# Altium PCB Motor Driver.PcbDoc
Units mil, origin at the board's own origin, x right, y up, seen from the top; angles counter-clockwise.
Board outline 1815.03 x 1805.03 mil, 4 copper layers (Top Layer, Signal Layer, GND, Bottom Layer), stack 23.756 mil thick; 39 components, 38 nets, 181 pads, 59 vias.
Unrouted connection lines stored in the file: 7.
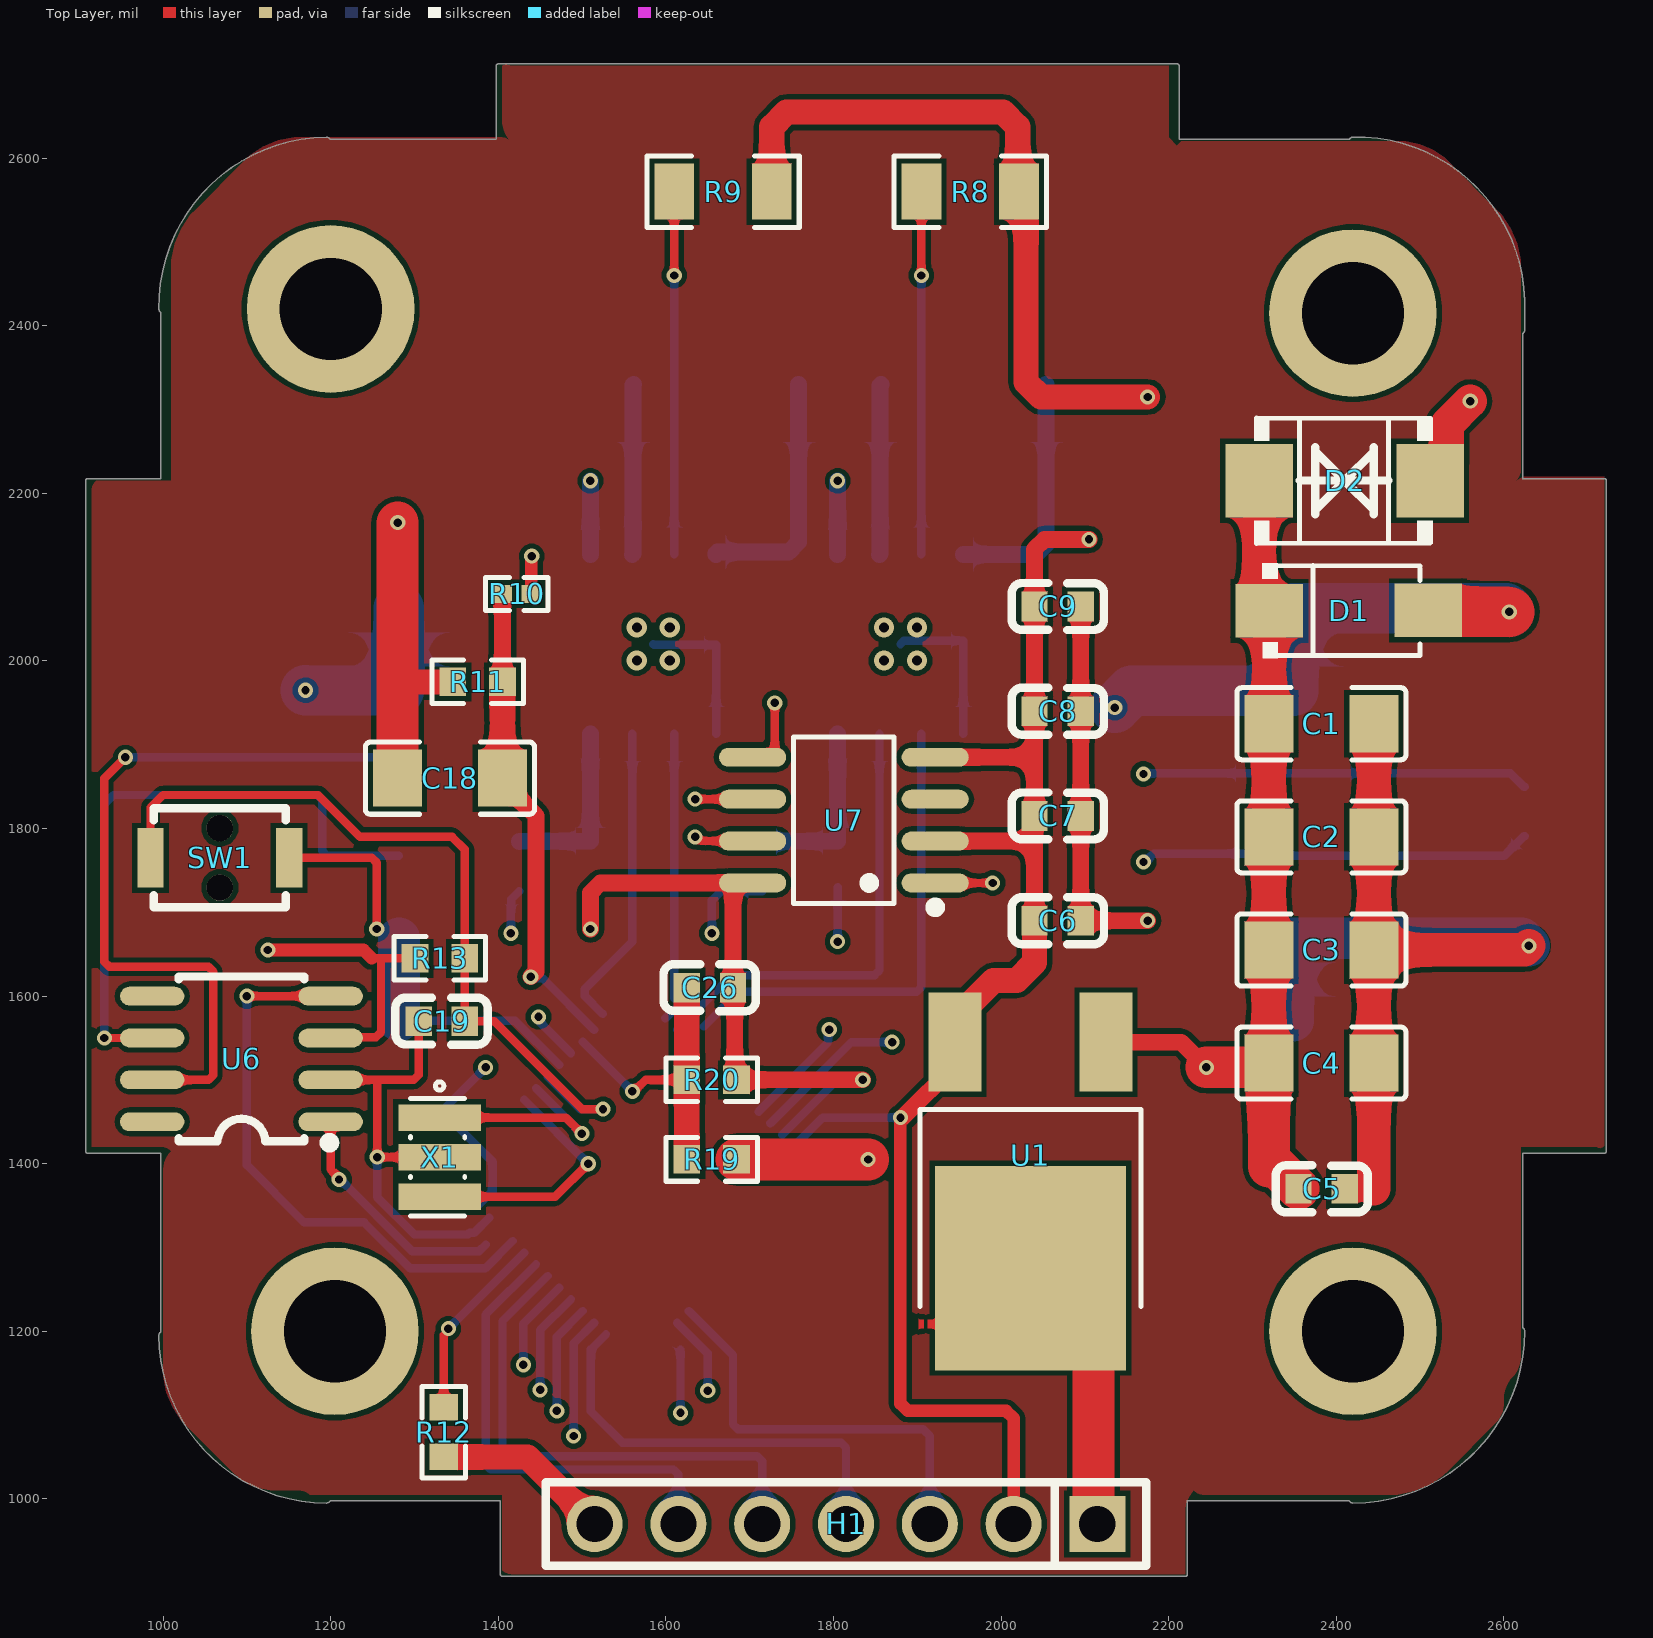
[diagram p0: Top Layer view]
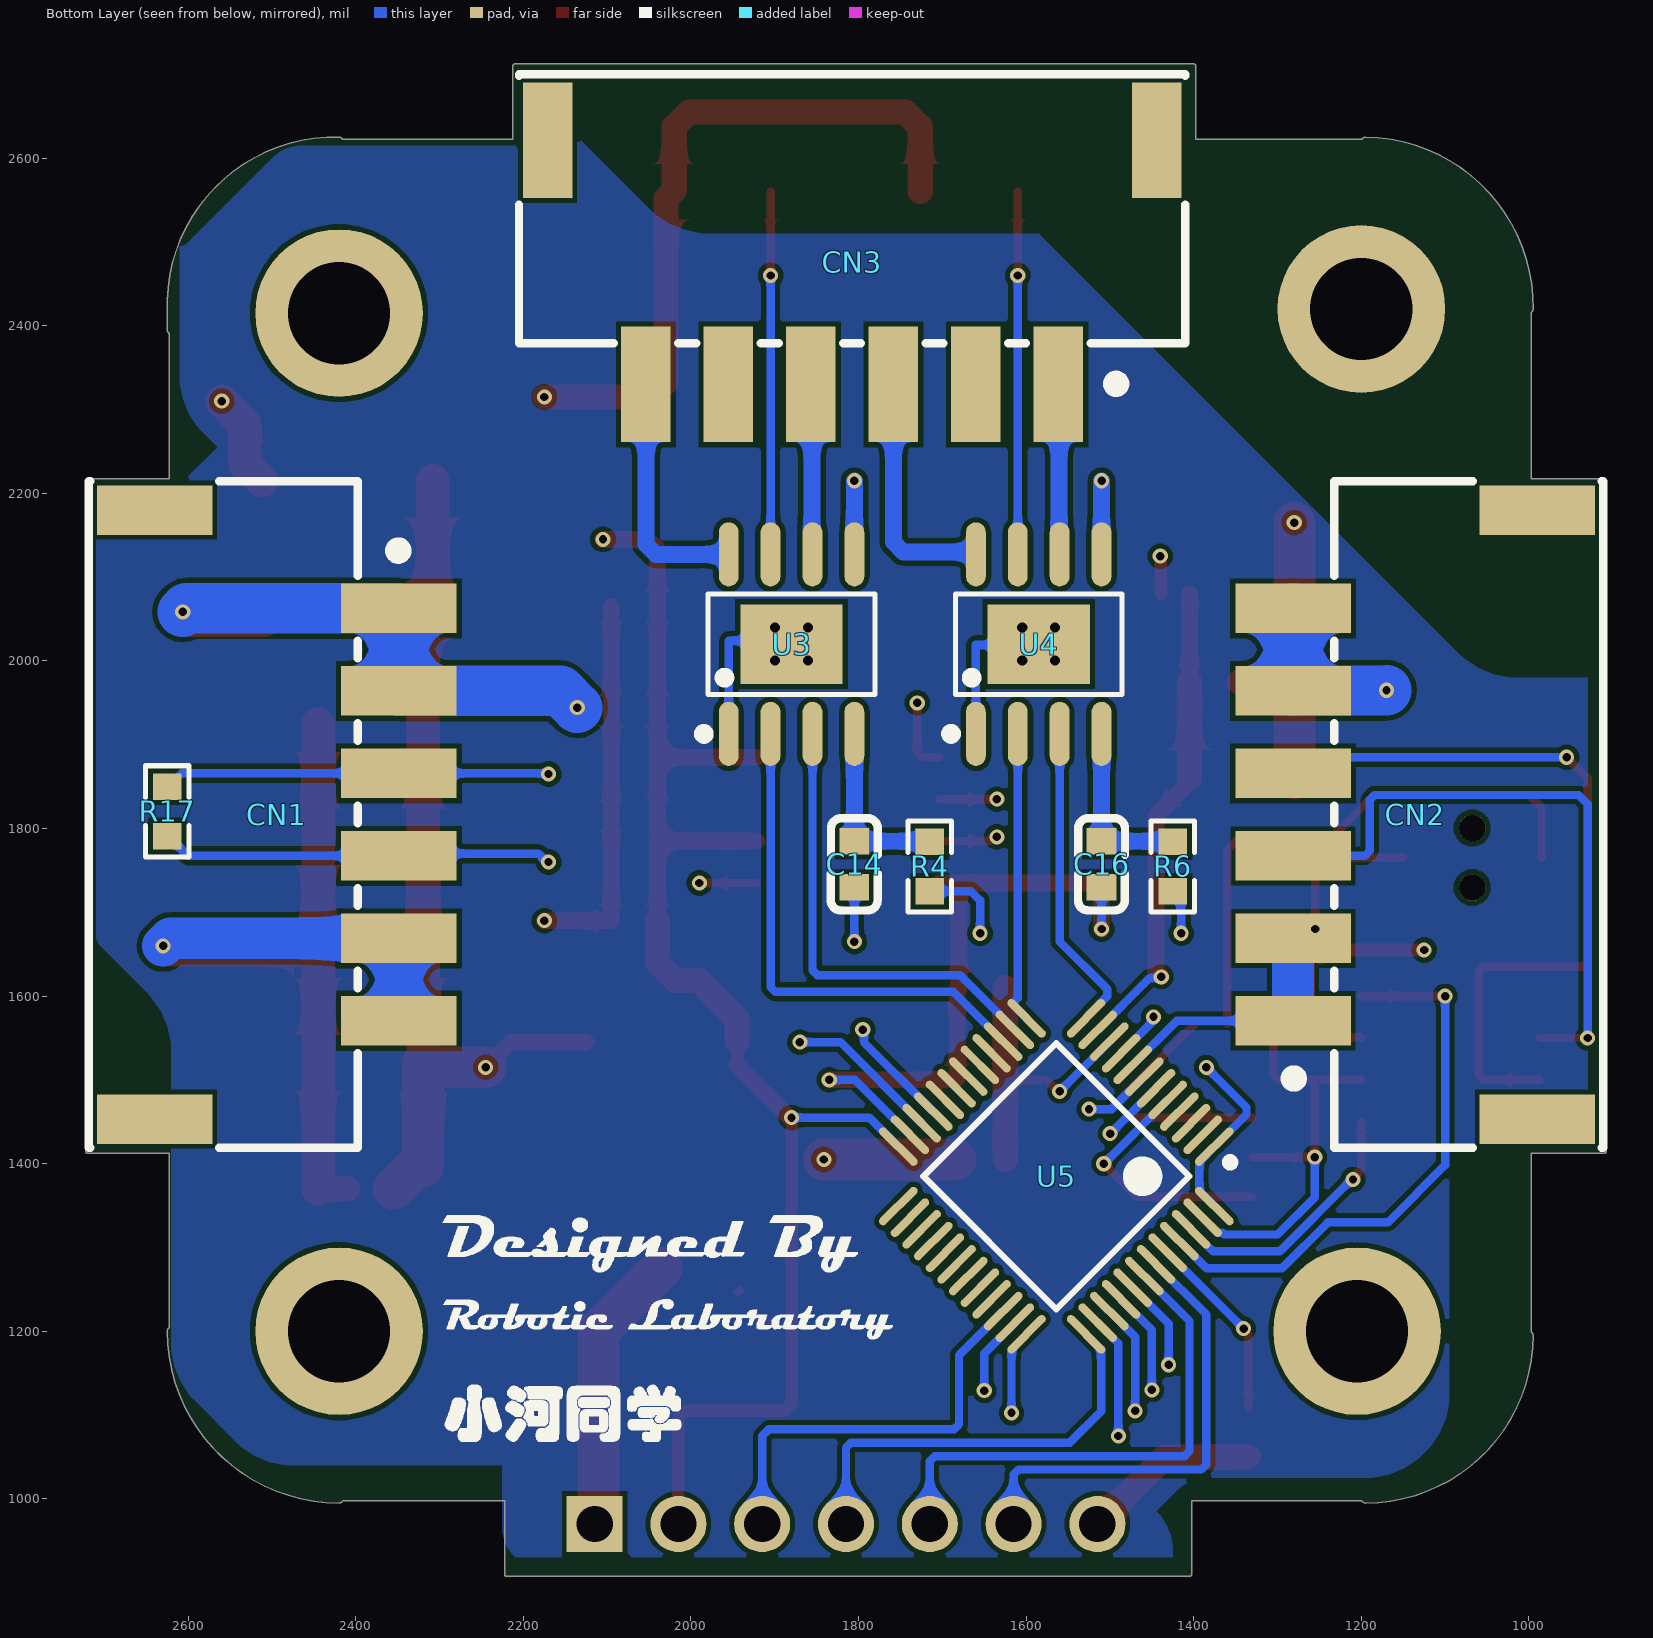
[diagram p1: Bottom Layer view, seen from below]
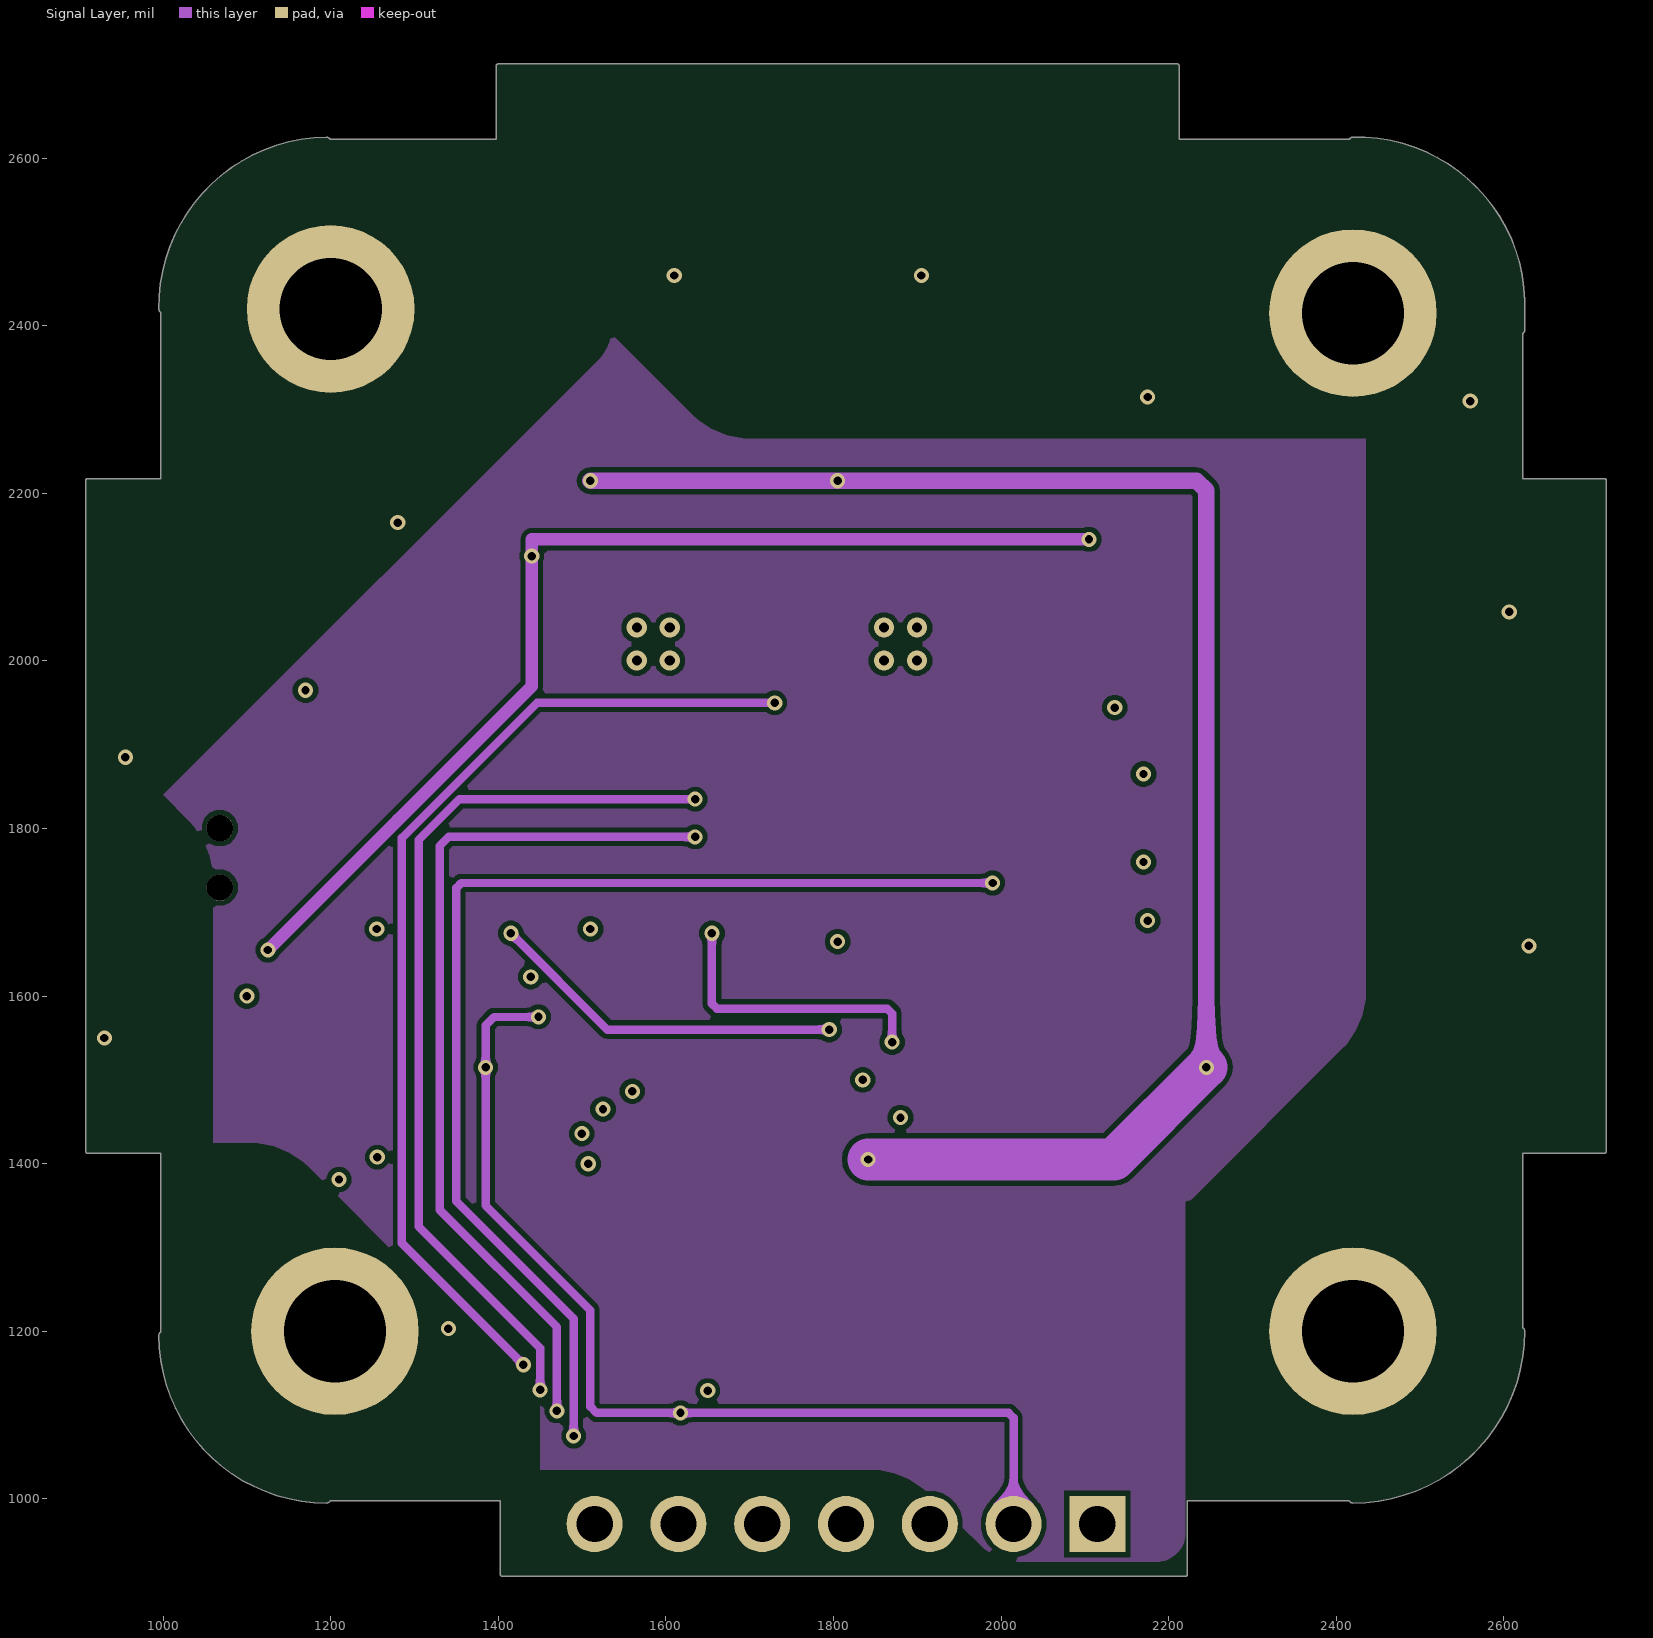
[diagram p2: Signal Layer]
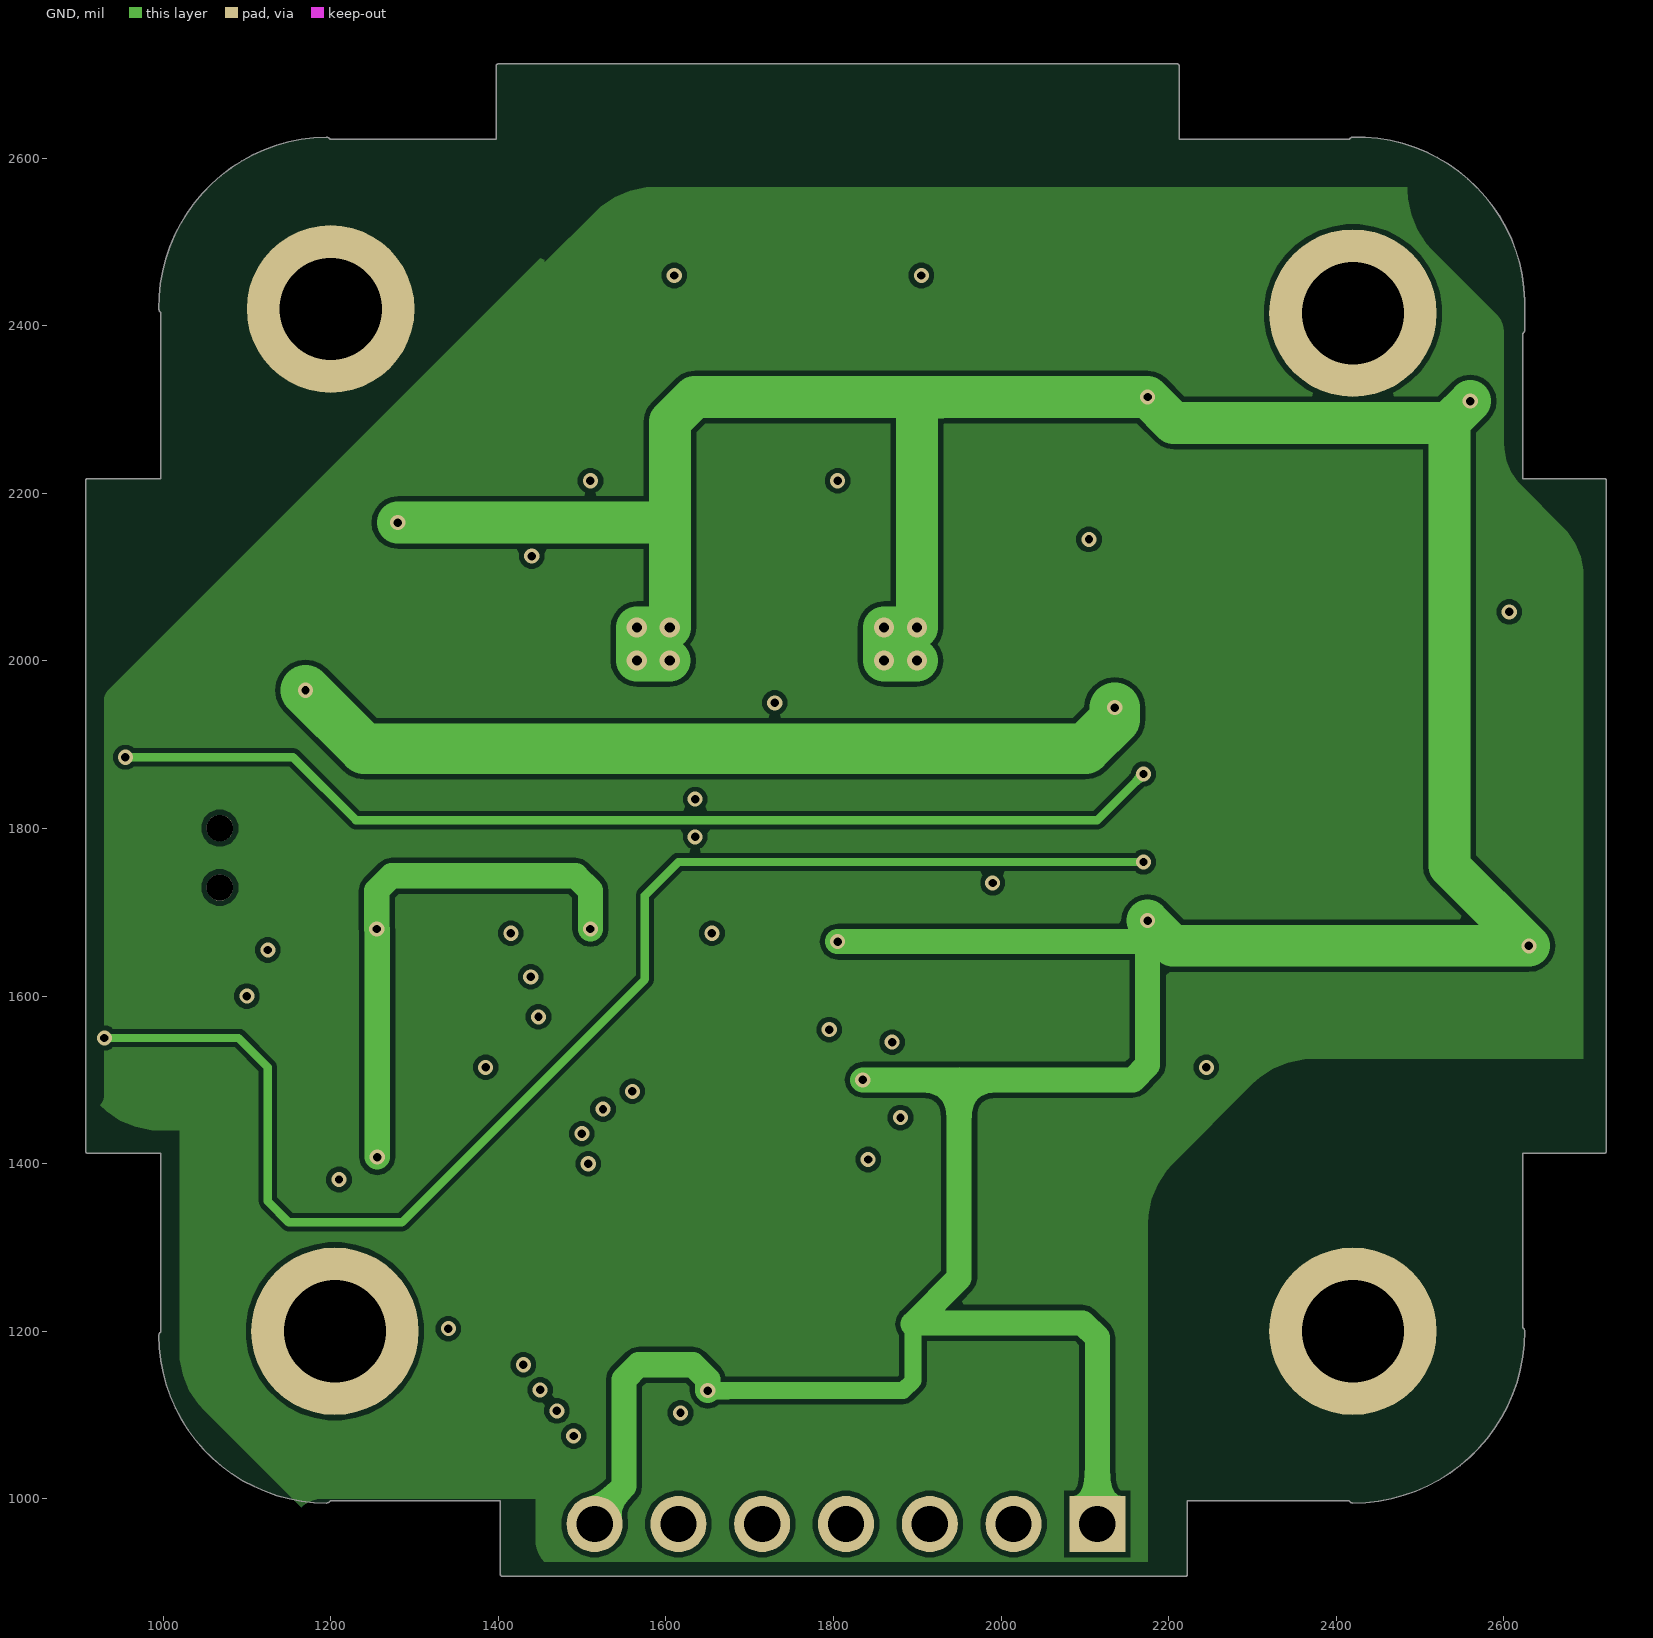
[diagram p3: GND]

## Layer stack, top to bottom
Top Solder: solder mask 0.4, Solder Resist, Dk 3.5
Top Layer: signal copper 1.4
Dielectric 2: prepreg 2.8, PP-006, Dk 4.1
Signal Layer: signal copper 1.378
Dielectric 1: dielectric 12.6, FR-4, Dk 4.8
GND: signal copper 1.378
Dielectric 3: prepreg 2.8, PP-006, Dk 4.1
Bottom Layer: signal copper 1.4
Bottom Solder: solder mask 0.4, Solder Resist, Dk 3.5

## Board outline
994.99,1195 cw(c1000,1195) 997.49,1199.34 997.49,1412.48 910,1412.48 cw(c910,1415) 907.49,1415 907.49,2215 cw(c910,2215) 910,2217.51 997.49,2217.51 997.49,2415.66 cw(c1000,2420) 994.99,2419.94 cw(c1197.5,2422.5) 1194.94,2625.01 cw(c1195,2620) 1199.34,2622.52 1397.48,2622.52 1397.48,2710 cw(c1400,2710) 1400,2712.52 2210,2712.52 cw(c2210,2710) 2212.51,2710 cw(c2210,2710) 2212.51,2710 2212.51,2622.51 2415.66,2622.51 cw(c2420,2620) 2419.87,2625.01 cw(c2425,2425) 2625.01,2430.13 cw(c2620,2430) 2625.01,2430 2625.01,2395 cw(c2620,2395) 2622.51,2390.66 2622.51,2217.51 2720,2217.51 cw(c2720,2215) 2722.51,2215 2722.51,1415 cw(c2720,1415) 2720,1412.48 2622.51,1412.48 2622.51,1204.34 cw(c2620,1200) 2625.01,1200 cw(c2420,1200) 2420,994.99 cw(c2420,1000) 2415.66,997.49 2222.51,997.49 2222.51,910 cw(c2220,910) 2220,907.49 1405,907.49 cw(c1405,910) 1402.48,910 1402.48,997.49 1199.34,997.49 cw(c1195,1000) 1195,994.99 cw(c1195,1195)

## Design rules (kind name [scope] priority, off if disabled: settings)
Clearance [All] p1: gap=6 ignorepadtopadclearanceinfootprint=FALSE
ComponentClearance [All] p1: gap=0 collisioncheckmode=3 verticalgap=0 showdistances=FALSE
HoleSize [All] p1: absolutevalues=TRUE maxlimit=10000 minlimit=8 maxpercent=80.000 minpercent=20.000
MinimumSolderMaskSliver [All] p1: minsoldermaskwidth=1
PolygonConnect [All] p1: connectstyle=Relief reliefconductorwidth=10 reliefentries=4 polygonreliefangle="90 Angle" airgapwidth=10
RoutingVias [All] p1: holewidth=28 width=50 viastyle="Through Hole" minholewidth=28 minwidth=50 maxholewidth=28 maxwidth=50
SilkToSilkClearance [All] p1: silktosilkclearance=0
SilkToSolderMaskClearance [IsPad] p1: minsilkscreentomaskgap=0 clearancetoexposedcopper=TRUE
SolderMaskExpansion [All] p1: expansion=4 istentingtop=FALSE
Width [All] p1: maxlimit=1000 minlimit=10 preferedwidth=10
25 further rules are at their usual default settings.

## Classes and differential pairs
component class MCU: SW3

## Components (designator, comment, footprint, x,y, rotation, side; value= is the part's Value field where it differs from the comment)
C1 "100uF" C1206 2382.3,1925 r0 top
C2 "100uF" C1206 2382.3,1790 r0 top
C3 "100uF" C1206 2382.3,1655 r0 top
C4 "100uF" C1206 2382.3,1520 r0 top
C5 "100nF" C0603 2382.55,1370 r180 top
C6 "1uF" C0603 2067.55,1690 r180 top
C7 "1uF" C0603 2067.55,1815 r180 top
C8 "100nF" C0603 2067.55,1940 r180 top
C9 "100nF" C0603 2067.55,2065 r180 top
C14 "100nF" C0603 1805,1757.44 r90 bottom
C16 "100nF" C0603 1510,1757.44 r90 bottom
C18 "10uF" C1206 1342.3,1860 r0 top
C19 "100nF" C0603 1332.56,1570 r0 top
C26 "100nF" C0603 1652.56,1610 r0 top
CN1 "WAFER-254W-6P" CONN-SMD_WAFER-254W-6P 2494.33,1816.61 r270 bottom
CN2 "WAFER-254W-6P" CONN-SMD_WAFER-254W-6P 1135.67,1816.62 r90 bottom
CN3 "WAFER-254W-6P" CONN-SMD_WAFER-254W-6P 1807.64,2475.67 r0 bottom
D1 "SS54" SMA_L4.3-W2.6-LS5.0-RD 2415,2060 r0 top
D2 "SMBJ28CA" SMB_L4.6-W3.6-LS5.3-BI 2410,2215 r180 top
H1 "PZ254V-11-07P" HDR-TH_7P-P2.54-V-M 1815,970 r180 top
R4 "1K" R0603 1715,1754.66 r90 bottom
R6 "1K" R0603 1425,1754.65 r90 bottom
R8 "0.1" R1206 1963.22,2560 r0 top
R9 "0.1" R1206 1668.22,2560 r0 top
R10 "NTCThermistor" R0402 1422.04,2080 r180 top
R11 "3.3K" R0603_NEW 1375.35,1975 r0 top
R12 "10K" R0603 1335,1079.66 r270 top
R13 "10K" R0603 1330.34,1645 r180 top
R17 "120" R0603 2625,1820.34 r270 bottom
R19 "10K" R0603 1654.65,1405 r180 top
R20 "1K" R0603 1654.66,1500 r0 top
SW1 "K2-1807UA-A4DW-06" KEY-SMD_L4.0-W2.9-L 1067.68,1765 r0 top
U1 "LP2950CDTX-3.3/NOPB" TO-252-2_L6.6-W6.1-P4.57-LS9.9-BR-CW 2035.16,1410.2 r90 top
U3 "A4950ELJTR-T" SOIC-8_L4.9-W3.9-P1.27-LS6.0-BL-EP 1880,2020 r180 bottom
U4 "A4950ELJTR-T" SOIC-8_L4.9-W3.9-P1.27-LS6.0-BL-EP 1585,2020 r180 bottom
U5 "STM32F103C8T6" STM-LQFP48_L 1564.01,1384.91 r315 bottom
U6 "SN65HVD232DR" SOIC-8_L5.0-W4.0-P1.27-LS6.0-BL 1093.5,1525 r90 top
U7 "MT6816CT-ACD" SOP-8_L5.0-W4.0-P1.27-LS6.0-BL 1812.5,1810 r90 top
X1 "12MHz" CRYSTAL-SMD_3P-L3.2-W1.3-P1.2-BL 1330,1407.76 r270 top

## Footprints (in the part's own frame and the unit in brackets; to place one, negate y for a bottom-side part, rotate by r counter-clockwise, add the part's x,y. Pads: shape width x height; smd on the part's side, far side on the other; paste and mask are expansions set on the pad)
C0603 [mm]
  rect 0.8x0.9 smd: 1(-0.7,0) 2(0.7,0)
  silkscreen extent -1.41,-0.71 1.39,0.72
C1206 [mm]
  rect 1.485x1.728 smd: 1(-1.593,0) 2(1.593,0)
  silkscreen extent -2.56,-1.09 2.56,1.09
CONN-SMD_WAFER-254W-6P [mm]
  rect 1.5x3.5 smd: 1(-6.25,3.7) 2(-3.75,3.7) 3(-1.25,3.7) 4(1.25,3.7) 5(3.75,3.7) 6(6.25,3.7) 7(-9.23,-3.7) 8(9.23,-3.7)
  silkscreen extent -10.1,-5.7 10.1,3.88
CRYSTAL-SMD_3P-L3.2-W1.3-P1.2-BL [mm]
  rect 0.8x2.5 smd: 1(-1.2,0) 2(0,0) 3(1.2,0)
  silkscreen extent -2.29,-0.89 1.78,0.76
HDR-TH_7P-P2.54-V-M [mm]
  rect 1.7x1.7 hole 1.1: 1(-7.62,0)
  round 1.7 hole 1.1: 2(-5.08,0) 3(-2.54,0) 4(0,0) 5(2.54,0) 6(5.08,0) 7(7.62,0)
  silkscreen extent -9.1,-1.27 9.1,1.27
KEY-SMD_L4.0-W2.9-L [mm]
  rect 0.8x1.8 smd: 1(-2.1,0) 2(2.1,0)
  round 0.8 hole 0.8 unplated: ""(0,-0.9) ""(0,0.9)
  silkscreen extent -2,-1.5 2,1.5
R0402 [mm]
  rect 0.566x0.54 smd: 1(-0.433,0) 2(0.433,0)
  silkscreen extent -0.94,-0.5 0.94,0.5
R0603 [mil]
  rect 31.75x34.02 smd: 1(-29.66,0) 2(29.65,0)
  silkscreen extent -55,-26 55,26
R0603_NEW [mil]
  rect 31.75x34.02 smd: 1(-29.65,0) 2(29.65,0)
  silkscreen extent -55,-26 55,26
R1206 [mil]
  rect 47.54x66.97 smd: 1(-58.22,0) 2(58.22,0)
  silkscreen extent -91,-42 91,42
SMA_L4.3-W2.6-LS5.0-RD [mm]
  rect 2.046x1.62 smd: 1(-2.404,-0.009) 2(2.404,0.009)
  silkscreen extent -2.61,-1.44 2.16,1.44
SMB_L4.6-W3.6-LS5.3-BI [mil]
  rect 80.61x88.23 smd: 1(-102.02,0) 2(102.02,0)
  silkscreen extent -105,-75 108,75
SOIC-8_L4.9-W3.9-P1.27-LS6.0-BL-EP [mm]
  oval 0.602x1.941 smd: 1(-1.905,-2.72) 2(-0.635,-2.72) 3(0.635,-2.72) 4(1.905,-2.72) 5(1.905,2.72) 6(0.635,2.72) 7(-0.635,2.72) 8(-1.905,2.72)
  rect 3.098x2.41 smd: 9(0,0)
  silkscreen extent -2.81,-2.87 2.53,1.52
SOIC-8_L5.0-W4.0-P1.27-LS6.0-BL [mil]
  oval 22.38x76.78 smd: 1(-75,-106.5) 2(-25,-106.5) 3(25,-106.5) 4(75,-106.5) 5(75,106.5) 6(25,106.5) 7(-25,106.5) 8(-75,106.5)
  silkscreen extent -106,-111 98,75
SOP-8_L5.0-W4.0-P1.27-LS6.0-BL [mil]
  oval 22.6x80.14 smd: 1(-75,-108.97) 2(-25,-108.97) 3(25,-108.97) 4(75,-108.97) 5(75,108.97) 6(25,108.97) 7(-25,108.97) 8(-75,108.97)
  silkscreen extent -110,-115 99,60
STM-LQFP48_L [mm] "QFP, 48-Leads, Body 7x7mm, Pitch 0.5mm, IPC High Density"
  oval 1.55x0.25 smd: 1(-4.025,2.75) 2(-4.025,2.25) 3(-4.025,1.75) 4(-4.025,1.25) 5(-4.025,0.75) 6(-4.025,0.25) 7(-4.025,-0.25) 8(-4.025,-0.75) 9(-4.025,-1.25) 10(-4.025,-1.75) 11(-4.025,-2.25) 12(-4.025,-2.75) 25(4.025,-2.75) 26(4.025,-2.25) 27(4.025,-1.75) 28(4.025,-1.25) 29(4.025,-0.75) 30(4.025,-0.25) 31(4.025,0.25) 32(4.025,0.75) 33(4.025,1.25) 34(4.025,1.75) 35(4.025,2.25) 36(4.025,2.75)
  oval 0.25x1.55 smd: 13(-2.75,-4.025) 14(-2.25,-4.025) 15(-1.75,-4.025) 16(-1.25,-4.025) 17(-0.75,-4.025) 18(-0.25,-4.025) 19(0.25,-4.025) 20(0.75,-4.025) 21(1.25,-4.025) 22(1.75,-4.025) 23(2.25,-4.025) 24(2.75,-4.025) 37(2.75,4.025) 38(2.25,4.025) 39(1.75,4.025) 40(1.25,4.025) 41(0.75,4.025) 42(0.25,4.025) 43(-0.25,4.025) 44(-0.75,4.025) 45(-1.25,4.025) 46(-1.75,4.025) 47(-2.25,4.025) 48(-2.75,4.025)
  silkscreen extent -4.15,-2.85 2.85,3.55, body extent -3.5,-3.5 3.5,3.5, height 1.6
TO-252-2_L6.6-W6.1-P4.57-LS9.9-BR-CW [mm]
  rect 3x1.6 smd: 1(3.424,-2.29) 3(3.424,2.29)
  rect 6.2x5.8 smd: 2(-3.424,0)
  silkscreen extent -4.58,-3.35 1.38,3.35

## Part data
C1 C2 C3 C4: BOM_JLCPCB Part Class="Extended Part", BOM_Manufacturer="Murata Electronics", BOM_Manufacturer Part=GRM31CR61A107ME05L, BOM_Supplier=LCSC, BOM_Supplier Part=C312983, Contributor=LCSC, nameAlias=Capacitance, spicePre=C, spiceSymbolName=GRM31CR61A107ME05L
C5 C8 C9 C14 C16 C19 C26: BOM_JLCPCB Part Class="Extended Part", BOM_Manufacturer=SAMSUNG, BOM_Manufacturer Part=CL10B104KB8NNNC, BOM_Supplier=LCSC, BOM_Supplier Part=C1591, nameAlias=Capacitance, spicePre=C, spiceSymbolName=CL10B104KB8NNNC
C6 C7: BOM_JLCPCB Part Class="Basic Part", BOM_Manufacturer=SAMSUNG, BOM_Manufacturer Part=CL10A105KB8NNNC, BOM_Supplier=LCSC, BOM_Supplier Part=C15849, nameAlias=Capacitance, spicePre=C, spiceSymbolName=CL10A105KB8NNNC
C18: BOM_JLCPCB Part Class="Basic Part", BOM_Manufacturer=SAMSUNG, BOM_Manufacturer Part=CL31A106KBHNNNE, BOM_Supplier=LCSC, BOM_Supplier Part=C13585, nameAlias=Capacitance, spicePre=C, spiceSymbolName=CL31A106KBHNNNE
CN1 CN2 CN3: BOM_Manufacturer=XUNPU(讯普), BOM_Manufacturer Part=WAFER-254W-6P, BOM_Supplier=LCSC, BOM_Supplier Part=C2856747, Contributor=LCSC, spicePre=C, spiceSymbolName=WAFER-254W-6P
D1: library part SS54_C727065, BOM_JLCPCB Part Class="Extended Part", BOM_Manufacturer=TWGMC, BOM_Manufacturer Part=SS54, BOM_Supplier=LCSC, BOM_Supplier Part=C727065, Contributor=LCSC, spicePre=D, spiceSymbolName=SS54_C727065
D2: library part SMBJ28CA_C908204, BOM_JLCPCB Part Class="Extended Part", BOM_Manufacturer=FUXINSEMI, BOM_Manufacturer Part=SMBJ28CA, BOM_Supplier=LCSC, BOM_Supplier Part=C908204, Contributor=LCSC, spicePre=D, spiceSymbolName=SMBJ28CA_C908204
H1: BOM_JLCPCB Part Class="Extended Part", BOM_Manufacturer=XFCN, BOM_Manufacturer Part=PZ254V-11-07P, BOM_Supplier=LCSC, BOM_Supplier Part=C492406, Contributor=LCSC, spicePre=H, spiceSymbolName=PZ254V-11-07P
R4 R6 R20: BOM_JLCPCB Part Class="Basic Part", BOM_Manufacturer=UniOhm, BOM_Manufacturer Part=0603WAF1001T5E, BOM_Supplier=LCSC, BOM_Supplier Part=C21190, nameAlias="Resistance (Ohms)", spicePre=R, spiceSymbolName=0603WAF1001T5E
R8 R9: BOM_JLCPCB Part Class="Basic Part", BOM_Manufacturer=UniOhm, BOM_Manufacturer Part=1206W4F100LT5E, BOM_Supplier=LCSC, BOM_Supplier Part=C25334, nameAlias="Resistance (Ohms)", spicePre=R, spiceSymbolName=1206W4F100LT5E
R10: BOM_JLCPCB Part Class="Extended Part", BOM_Manufacturer=MuRata, BOM_Manufacturer Part=NCP15XH103F03RC, BOM_Supplier=LCSC, BOM_Supplier Part=C77131, nameAlias=Value, spicePre=R, spiceSymbolName=NCP15XH103F03RC
R11: BOM_JLCPCB Part Class="Basic Part", BOM_Manufacturer=UniOhm, BOM_Manufacturer Part=0603WAF3301T5E, BOM_Supplier=LCSC, BOM_Supplier Part=C22978, nameAlias="Resistance (Ohms)", spicePre=R, spiceSymbolName=0603WAF3301T5E
R12 R13 R19: BOM_JLCPCB Part Class="Basic Part", BOM_Manufacturer=UniOhm, BOM_Manufacturer Part=0603WAF1002T5E, BOM_Supplier=LCSC, BOM_Supplier Part=C25804, nameAlias="Resistance (Ohms)", spicePre=R, spiceSymbolName=0603WAF1002T5E
R17: BOM_JLCPCB Part Class="Basic Part", BOM_Manufacturer=UniOhm, BOM_Manufacturer Part=0603WAF1200T5E, BOM_Supplier=LCSC, BOM_Supplier Part=C22787, nameAlias="Resistance (Ohms)", spicePre=R, spiceSymbolName=0603WAF1200T5E
SW1: BOM_JLCPCB Part Class="Extended Part", BOM_Manufacturer="Korean Hroparts Elec", BOM_Manufacturer Part=K2-1807UA-A4DW-06, BOM_Supplier=LCSC, BOM_Supplier Part=C502307, Contributor=LCSC, spicePre=S, spiceSymbolName=K2-1807UA-A4DW-06
U1 U6: BOM_JLCPCB Part Class="Extended Part", BOM_Manufacturer=TI, BOM_Supplier=LCSC, spicePre=U
  U1: BOM_Manufacturer Part=LP2950CDTX-3.3/NOPB, BOM_Supplier Part=C129994, Contributor=LCSC, spiceSymbolName=LP2950CDTX-3.3/NOPB
  U6: BOM_Manufacturer Part=SN65HVD232DR, BOM_Supplier Part=C30530, spiceSymbolName=SN65HVD232DR
U3 U4: BOM_JLCPCB Part Class="Extended Part", BOM_Manufacturer=ALLEGRO, BOM_Manufacturer Part=A4950ELJTR-T, BOM_Supplier=LCSC, BOM_Supplier Part=C82404, spicePre=U, spiceSymbolName=A4950ELJTR-T
U5: library part CMP-0237-00215-3, "ARM Cortex-M3 32-bit MCU, 64 KB Flash, 20 KB Internal RAM, 37 I/Os, 48-pin LQFP, -40 to 85 degC, Tray", I/Os (High Current)=37, Operating Frequency(F) (Processor speed) (MHz)=72, Supply Voltage(Vcc) min (V)=2, A/D Converter="2x12-bit (10 Channel)", ComponentLink1Description="Manufacturer URL", ComponentLink1URL=http://www.st.com/web/en/home.html, ComponentLink2Description=Datasheet, ComponentLink2URL=http://www.st.com/st-web-ui/static/active/en/resource/technical/document/datasheet/CD00161566.pdf, ComponentLink3Description="Package Specification", ComponentLink3URL=http://www.st.com/st-web-ui/static/active/en/resource/technical/document/datasheet/DM00058181.pdf, Core="ARM Cortex-M3", DatasheetVersion="Rev. 16", FLASH Size (Prog) (kB)=64, Internal RAM Size (kB)=20, Mounting Technology="Surface Mount", PackageDescription="48-Pin Low Profile Quad Flat Package, 7 x 7 mm Body, 0.5 mm Pitch", PackageReference=LQFP48, PackageVersion="Rev. 6, 06/2013", Packing=Tray, PartNumber=STM32F103C8T6
U7: BOM_JLCPCB Part Class="Extended Part", BOM_Manufacturer="Magn Tek", BOM_Manufacturer Part=MT6816CT-ACD, BOM_Supplier=LCSC, BOM_Supplier Part=C879560, Contributor=LCSC, spicePre=U, spiceSymbolName=MT6816CT-ACD
X1: BOM_JLCPCB Part Class="Extended Part", BOM_Manufacturer=muRata(村田), BOM_Manufacturer Part=CSTNE12M0G52A000R0, BOM_Supplier=LCSC, BOM_Supplier Part=C907957, Contributor=LCSC, nameAlias=Frequency, spicePre=X, spiceSymbolName=CSTNE12M0G52A000R0

## Free pads (board coordinates)
  round 200 hole 122: GND(1200,2420) GND(1205,1200) GND(2420,1200) GND(2420,2415)

## Via types
v1: diameter 18, hole 10, Top Layer to Bottom Layer, 51 vias
v2: diameter 24, hole 12, Top Layer to Bottom Layer, 8 vias

## Nets (pads, with @x,y where several pads share a name; then routed paths per layer and width w, separated by ;. In a path a pad name is that pad's centre, name@x,y a point inside that pad or via, vN(x,y) a via of type N, cw(c..) or ccw(c..) an arc to the next point about the centre after c; other vN are vias at no path point)
BUTTON_1: U5.25
BUTTON_2: U5.20
CAN_H: CN1.3 CN2.4 R17.1 U6.7 | length 2653.1
  Top Layer w10: v1(955,1885) 930,1860 930,1640.86 935.86,1635 1054.14,1635 1060,1629.14 1060,1505.86 1054.14,1500 U6.7
  GND w10: v1(955,1885) 1155,1885 1230,1810 2115,1810 v1(2170,1865)
  Bottom Layer w10: v1(955,1885) 1262.16,1885 CN2.4 ; v1(2170,1865) 2170.83,1865.83 CN1.3 2608.04,1865.83 2623.87,1850 R17.1
CAN_L: CN1.4 CN2.3 R17.2 U6.6 | length 2889.1
  Top Layer w10: v1(930,1550) U6.6
  GND w10: v1(930,1550) 1090,1550 1125,1515 1125,1355 1150,1330 1285,1330 1575,1620 1575,1720 1615,1760 v1(2170,1760)
  Bottom Layer w10: v1(930,1550) 930,1829.14 940.86,1840 1184.14,1840 1190,1834.14 1190,1773.26 1195.86,1767.4 CN2.3 ; v1(2170,1760) 2172.16,1760 2182.16,1770 2346.06,1770 CN1.4 2600.58,1767.4 2623.87,1790.69 R17.2
CAN_RX: U5.45 U6.4 | length 683.5
  Top Layer w10: v1(1100,1600) U6.4
  Bottom Layer w10: v1(1100,1600) 1100,1398.28 1168.28,1330 1240,1330 1295,1275 1384.51,1275 U5.45
CAN_TX: U5.46 U6.1 | length 287
  Top Layer w10: U6.1 1200,1393.25 1210,1383.25 v1(1210,1381.08)
  Bottom Layer w10: v1(1210,1381.08) 1211.54,1381.08 1297.17,1295.46 1377.01,1295.46 U5.46@1385.15,1303.59
GND: C1.2 C2.2 C3.2 C4.2 C5.1 C6.1 C7.1 C8.1 C9.1 C14.1 C16.1 C18.1 C19.1 C26.2 CN1.5 CN1.6 CN2.1 CN2.2 D2.1 H1.1 H1.7 R8.2 R9.2 R11.1 R12.2 R20.2 SW1.2 U1.2 U3.1 U3.9 U4.1 U4.9 U5.8 U5.23 U5.35 U5.47 U6.2 U7.8 X1.2 | length 12019
  Top Layer w10: SW1.2 1249.14,1765 1255,1759.14 v1(1255,1680) ; U6.2 1299.03,1500 1304.89,1505.86 1304.89,1569.89 C19.1 ; 1255.86,1495.86 1255.57,1495.57 v1(1255.57,1407.76) X1.2 ; U1.2@1942,1248.53 U1.2@1944.16,1246.37
  Top Layer w20: v1(1510,1680) 1510,1723.28 1521.72,1735 U7.8@1681.31,1735 ; U7.8 U7.8@1681.31,1735 ; v1(1835,1500) R20.2 1682.21,1502.1 1682.21,1607.9 C26.2 1680.11,1733.8 U7.8@1681.31,1735 ; C9.1 C8.1 C7.1 C6.1 v1(2175,1690)
  Top Layer w30: 1297.18,1975 R11.1 ; R12.2 1435,1050 H1.7 ; R9.2 1726.44,2637.43 1744.01,2655 2002.43,2655 2020,2637.43 2020,2561.44 R8.2 2030,2551.44 2030,2332.57 2047.57,2315 v1(2175,2315) ; C5.1 2445,1370
  Top Layer w40: 2445,1370 C4.2 C3.2 ; C1.2 C2.2 C3.2 ; D2.1 2532.32,2235.3 2532.32,2282.32 v1(2560,2310) ; v1(2630,1660) 2625,1655 C3.2
  Top Layer w50: C18.1 1279.61,2164.61 v1(1280,2165) ; U1.2 2110.24,1200.31 2110.24,974.76 H1.1
  GND w20: v1(1650,1129.14) 1883.28,1129.14 1895,1140.86 1895,1208.4 1895.13,1208.53
  GND w30: v1(1255.57,1407.76) 1255.57,1679.43 v1(1255,1680) 1255,1725.98 1272.57,1743.56 1492.43,1743.56 1510,1725.98 v1(1510,1680) ; H1.7 1515,979.99 1550,1014.99 1550,1142.43 1567.57,1160 1632.43,1160 1650,1142.43 v1(1650,1129.14) ; v1(1805,1665) 2175,1665 ; v1(1835,1500) 1950,1500 ; 1895.13,1208.53 1896.6,1210 ; H1.1 2115,1192.43 2097.43,1210 1896.6,1210 ; v1(2175,1690) 2175,1665 ; 1896.6,1210 1950,1263.4 1950,1500 ; 1950,1500 2157.43,1500 2175,1517.57 2175,1665
  GND w50: v1(1280,2165) 1602.86,2165 1605,2162.86 ; v2(1604.68,2000.31) v2(1565.31,2000.31) v2(1565.31,2039.68) v2(1604.68,2039.68) 1605,2040 1605,2162.86 ; v2(1899.68,2000.31) v2(1860.31,2000.31) v2(1860.31,2039.68) v2(1899.68,2039.68) 1899.68,2305.39 1909.29,2315 ; v1(2175,1690) 2205,1660 v1(2630,1660) 2535,1755 2535,2285 ; v1(2560,2310) 2535,2285 ; 1605,2162.86 1605,2285.71 1634.29,2315 1909.29,2315 ; 1909.29,2315 v1(2175,2315) 2206,2284 2534,2284 2535,2285
  Bottom Layer w10: v1(1255,1680) 1266.02,1668.98 CN2.2 ; v1@1255.56,1407.75 1255.56,1359.69 1299.86,1315.4 1363.9,1315.4 1366.02,1317.51 1371.34,1317.51 U5.47 ; CN2.1 1420.13,1570.55 U5.8 ; v1(1510,1680) C16.1 ; U4.9 1585.86,2019.14 1660,2019.14 U4.1 ; U5.35 1613.43,1210.11 1650,1173.53 v1(1650,1129.14) ; U5.23 1804.38,1500 v1(1835,1500) ; v1(1805,1665) C14.1 ; U3.9 1884.14,2024.14 1955,2024.14 U3.1
  Bottom Layer w50: CN2.1 CN2.2 ; CN1.6 CN1.5 2621.02,1668.98 v1(2630,1660)
IN_AM: U3.2 U5.15 | length 581.2
  Bottom Layer w10: U5.15@1645.38,1563.72 1686.67,1605 1899.14,1605 1905,1610.86 U3.2
IN_AP: U3.3 U5.14 | length 553.1
  Bottom Layer w10: U5.14 1678.83,1625 1849.14,1625 1855,1630.86 U3.3
IN_BM: U4.2 U5.13 | length 349.3
  Bottom Layer w10: U5.13 1616.67,1590.68 1616.67,1590.8 1610,1597.47 U4.2
IN_BP: U4.3 U5.12 | length 366.6
  Bottom Layer w10: U5.12@1524.51,1578.61 1524.51,1578.72 1503.25,1599.97 1503.25,1608.25 1560,1665 U4.3
IN_PWM_A: R4.1 U5.22 | length 627.1
  Signal Layer w10: v1(1655,1675) 1655,1590.86 1660.86,1585 1864.14,1585 1870,1579.14 v1(1870,1545)
  Bottom Layer w10: v1(1655,1675) 1655,1714.14 1665.86,1725 R4.1 ; U5.22 1821.54,1545 v1(1870,1545)
IN_PWM_B: R6.1 U5.21 | length 614.5
  Signal Layer w10: v1(1415,1675) 1530,1560 v1(1795,1560)
  Bottom Layer w10: v1(1415,1675) 1415,1700 1415.45,1700.45 1415.45,1715.45 R6.1 ; U5.21 1793.47,1544.77 1793.47,1558.47 v1(1795,1560)
MT6816_CS: U5.38 U7.1 | length 1568.5
  Top Layer w10: U7.1 v1(1990,1735)
  Signal Layer w10: v1(1490,1075) 1490,1215 1350,1355 1350,1729.14 1355.86,1735 v1(1990,1735)
  Bottom Layer w10: v1(1490,1075) 1490,1185.51 1514.6,1210.11 U5.38
NetC19_2: C19.2 R13.1 SW1.1 U5.7 | length 963.9
  Top Layer w10: SW1.1 985,1825 1000,1840 1185,1840 1235,1790 1345,1790 1360,1775 R13.1 C19.2@1360,1570.11 ; C19.2 1395,1570 1500,1465 v1(1525,1465)
  Top Layer w15: C19.2@1360,1570.11 C19.2
  Bottom Layer w10: U5.7@1458.81,1503.92 U5.7 1497.84,1465 v1(1525,1465)
NetR8_1: R8.1 U3.7 | length 432.9
  Top Layer w10: v1(1905,2460) R8.1
  Bottom Layer w10: U3.7 v1(1905,2460)
NetR9_1: R9.1 U4.7 | length 432.9
  Top Layer w10: v1(1610,2460) R9.1
  Bottom Layer w10: U4.7 v1(1610,2460)
NetR12_1: R12.1 U5.44 | length 224.2
  Top Layer w10: R12.1 1335,1195.52 1340.38,1200.9 v1(1340.38,1203.06)
  Bottom Layer w10: v1(1340.38,1203.06) U5.44
NetU5_5: U5.5 X1.3 | length 301.5
  Top Layer w10: X1.3 1467.97,1360.51 v1(1507.36,1399.91)
  Bottom Layer w10: U5.5 U5.5 1507.31,1399.91 v1(1507.36,1399.91)
NetU5_6: U5.6 X1.1 | length 254.9
  Top Layer w10: X1.1 1480.5,1455 v1(1499.75,1435.75)
  Bottom Layer w10: U5.6 1499.25,1435.75 v1(1499.75,1435.75)
OUT_A+: CN3.4 U3.6 | length 203.7
  Bottom Layer w20: U3.6 1855.71,2127.81 1855.71,2328.86 CN3.4
OUT_A-: CN3.6 U3.8 | length 294.7
  Bottom Layer w20: U3.8 2041.98,2127.11 2053.7,2138.82 CN3.6
OUT_B+: CN3.1 U4.6 | length 203.5
  Bottom Layer w20: U4.6 1560.71,2127.81 1560.71,2329.13 CN3.1
OUT_B-: CN3.3 U4.8 | length 293.5
  Bottom Layer w20: U4.8 1660,2128.29 1661.71,2130 1746.71,2130 1758.42,2141.72 CN3.3
POWER_U: C26.1 R19.2 R20.1 U5.10 | length 359.5
  Top Layer w10: v1(1560,1486.36) 1562.16,1486.36 1575.81,1500 R20.1
  Top Layer w30: R19.2 R20.1 C26.1
  Bottom Layer w10: U5.10 v1(1560,1486.36)
SPI1_MISO: U5.40 U7.6 | length 1258.3
  Top Layer w10: v1(1635,1835) U7.6
  Signal Layer w10: v1(1450,1130) 1450,1180 1305,1325 1305,1786.21 1353.79,1835 v1(1635,1835)
  Bottom Layer w10: v1(1450,1130) 1450,1201.3 U5.40
SPI1_MOSI: U5.41 U7.5 | length 1398.4
  Top Layer w10: U7.5 1724.18,1885 1730,1890.82 v1(1730,1950)
  Signal Layer w10: v1(1430,1160) 1285,1305 1285,1788.84 1446.16,1950 v1(1730,1950)
  Bottom Layer w10: v1(1430,1160) 1430,1209.14 U5.41
SPI1_SCK: U5.39 U7.7 | length 1244.1
  Top Layer w10: v1(1635,1790) 1637.16,1790 1642.16,1785 U7.7
  Signal Layer w10: v1(1470,1105) 1470,1205 1330,1345 1330,1779.14 1340.86,1790 v1(1635,1790)
  Bottom Layer w10: v1(1470,1105) 1470,1193.46 U5.39
SWCLK: H1.4 U5.37 | length 512.8
  Bottom Layer w10: U5.37 1510.53,1178.32 1510.53,1104.47 1548,1067 1809.14,1067 1815,1061.14 H1.4
SWDIO: H1.3 U5.34 | length 502.7
  Bottom Layer w10: U5.34 1680.14,1171.34 1680.14,1088.86 1686,1083 1907,1083 1915,1075 H1.3
TEMP: C18.2 R10.2 R11.2 U5.11 | length 578.3
  Top Layer w20: C18.2 1405,1855.22 1445,1815.22 1445,1629.22 v1(1438.75,1622.97) ; R11.2 R10.2
  Top Layer w30: C18.2 R11.2
  Bottom Layer w10: v1(1438.75,1622.97) 1440.28,1621.44 1452.77,1621.44 U5.11
UART1_RX: H1.6 U5.43 | length 557.8
  Bottom Layer w10: U5.43 1385,1219.82 1385,1040.86 1390.86,1035 1609.14,1035 1615,1029.14 H1.6
UART1_TX: H1.5 U5.42 | length 621.3
  Bottom Layer w10: U5.42 1405,1211.98 1405,1056.86 1410.86,1051 1709,1051 1715,1045 H1.5
VCC: C1.1 C2.1 C3.1 C4.1 C5.2 D1.1 D2.2 R19.1 U1.1 U3.5 U4.5 | length 3289.2
  Top Layer w20: U1.1 2215,1545 v1(2245,1515)
  Top Layer w40: D2.2 2307.98,2071.52 2319.87,2059.63 D1.1 2319.98,2059.26 2319.98,1925.37 C1.1 C2.1 C3.1 C4.1
  Top Layer w50: R19.1 v1(1841.5,1405) ; v1(2245,1515) 2315.37,1515 C4.1@2319.61,1519.23 ; C4.1 C4.1@2319.61,1519.23 ; C5.2 2328.49,1396.51 2319.61,1396.51 C4.1@2319.61,1519.23
  Signal Layer w20: v1(1510,2215) v1(1805,2215) 2233.28,2215 2245,2203.28 v1(2245,1515)
  Signal Layer w50: v1(1841.5,1405) 2135,1405 v1(2245,1515)
  Bottom Layer w20: U4.5 v1(1510,2215) ; U3.5 v1(1805,2215)
VCC_3V3: C6.2 C7.2 C8.2 C9.2 H1.2 R10.1 R13.2 U1.3 U5.1 U5.9 U5.24 U5.36 U5.48 U6.3 U7.2 U7.4 | length 5045
  Top Layer w10: U6.3 1200.95,1550.95 1254.14,1550.95 1260,1556.81 1260,1645 ; 1249.14,1645 1260,1645 ; R13.2 1260,1645
  Top Layer w15: v1(1125,1655) 1239.14,1655 1249.14,1645 ; R10.1 1439.54,2080.46 1439.54,2124.54 v1(1440,2125) ; v1@1883.13,1455.57 1880.57,1455.57 v1(1880,1455) 1880,1113.79 1888.79,1105 2006.21,1105 2015,1096.21 H1.2 ; U1.3@1945,1517.44 U1.3
  Top Layer w20: v1@1883.13,1455.57 U1.3@1945,1517.44 ; U7.2 2040,1785 ; U7.4 2040,1885 ; C6.2 2040,1785 ; v1(2105,2145) 2051.72,2145 2040,2133.28 C9.2 C8.2 2040,1885 ; 2040,1785 C7.2 2040,1885
  Top Layer w30: U1.3 1945,1572.56 1991.23,1618.79 2018.79,1618.79 2040,1640 C6.2
  Signal Layer w10: v1(1448.01,1575.28) 1447.73,1575 1395,1575 1385,1565 v1(1385,1515) 1385,1350 1510,1225 1510,1110 1517.49,1102.51 v1(1617.49,1102.51) 2009.14,1102.51 2015,1096.65 H1.2
  Signal Layer w15: v1(1125,1655) 1280.29,1810.29 1440,1970 1440,2145 v1(2105,2145)
  Bottom Layer w10: U5.48 1393.39,1367.4 1393.39,1402.31 1375.4,1420.29 U5.1 1337.05,1458.76 1337.05,1467.05 v1(1385,1515) ; v1(1448.01,1575.28) 1449.54,1573.74 1449.54,1568.98 U5.9 ; v1(1617.49,1102.51) U5.36@1617.49,1178.2 ; U5.24 1787.22,1455 v1(1880,1455)
VCC_IN: CN1.1 CN1.2 CN2.5 CN2.6 D1.2 | length 1910.4
  Top Layer w60: D1.2 2511.53,2058.48 v1(2606.52,2058.48)
  GND w60: v1(1170,1965) 1240,1895 2100.6,1895 2135.75,1930.15 v1(2135.75,1944.25)
  Bottom Layer w60: v1(1170,1965) 1170.28,1964.72 1280.87,1964.72 CN2.5 CN2.6 ; v1(2135.75,1944.25) 2155.75,1964.25 CN1.2 CN1.1 2602.32,2062.68 v1(2606.52,2058.48)
VREF_A: C14.2 R4.2 U3.4 | length 218.2
  Bottom Layer w20: R4.2 1715.35,1784.65 1804.65,1784.65 C14.2 U3.4
VREF_B: C16.2 R6.2 U4.4 | length 213.2
  Bottom Layer w20: R6.2 1425.35,1784.65 1509.65,1784.65 C16.2 U4.4
pads on no net: CN1.7 CN1.8 CN2.7 CN2.8 CN3.2 CN3.5 CN3.7 CN3.8 SW1. U5.2 U5.3 U5.4 U5.16 U5.17 U5.18 U5.19 U5.26 U5.27 U5.28 U5.29 U5.30 U5.31 U5.32 U5.33 U6.5 U6.8 U7.3

## Polygon pours and split planes (outlines as drawn)
no net on Top Layer "NONET_L01_P000" (solid, pour order 0): 1415,2710 2200,2710 2200,2625 2210,2615 2215,2620 2474.64,2620 cw(c2474.64,2534.64) 2535,2595 2590.71,2539.29 cw(c2520,2468.58) 2620,2468.58 2620,2227.07 cw(c2602.93,2227.07) 2615,2215 cw(c2627.07,2202.93) 2627.07,2220 2720,2220 2720,1415 ccw(c2707.93,1402.93) 2707.93,1420 2620,1420 2620,1169.14 cw(c2585.86,1169.14) 2610,1145 ccw(c2634.14,1120.86) 2600,1120.86 2600,1115 cw(c2563.79,1115) 2589.39,1089.39 2534.29,1034.29 cw(c2463.58,1105) 2463.58,1005 2242.07,1005 cw(c2242.07,1022.07) 2230,1010 ccw(c2254.14,985.86) 2220,985.86 2220,910 1417.07,910 cw(c1417.07,927.07) 1405,915 1405,1005 1175,1005 ccw(c1162.93,992.93) 1162.93,1010 1135,1010 cw(c1135,1082.43) 1083.79,1031.21 1029.29,1085.71 cw(c1100,1156.42) 1000,1156.42 1000,1390.86 cw(c1034.14,1390.86) 1010,1415 ccw(c997.93,1402.93) 997.93,1420 915,1420 915,2202.93 cw(c932.07,2202.93) 920,2215 1010,2215 1010,2468.58 cw(c1110,2468.58) 1039.29,2539.29 1095.71,2595.71 cw(c1166.42,2525) 1166.42,2625 1402.93,2625 cw(c1402.93,2607.93) 1415,2620 cw(c1439.14,2644.14) 1405,2644.14 1405,2715
no net on Signal Layer "NONET_L02_P001" (solid, pour order 1): 1535,2395 cw(c1486.72,2395) 1520.86,2360.86 1000,1840 1030.71,1809.29 cw(c960,1738.58) 1060,1738.58 1060,1425 1103.58,1425 cw(c1103.58,1325) 1174.29,1395.71 1450,1120 1450,1035 1843.58,1035 cw(c1843.58,935) 1914.29,1005.71 1975,945 ccw(c2023.28,993.28) 2023.28,925 2185.86,925 ccw(c2185.86,959.14) 2210,935 ccw(c2185.86,959.14) 2220,959.14 2220,1355 ccw(c2220,1367.07) 2228.54,1358.54 2405.71,1535.71 ccw(c2335,1606.42) 2435,1606.42 2435,2265 1701.42,2265 cw(c1701.42,2365) 1630.71,2294.29 1535,2390
no net on GND "NONET_L03_P002" (solid, pour order 2): 1455,2485 933.54,1963.54 ccw(c942.07,1955) 930,1955 930,1482.07 cw(c912.93,1482.07) 925,1470 925.71,1469.29 ccw(c996.42,1540) 996.42,1440 1020,1440 1020,1176.42 ccw(c1120,1176.42) 1049.29,1105.71 1165,990 cw(c1189.14,965.86) 1189.14,1000 1445,1000 1445,949.14 ccw(c1479.14,949.14) 1455,925 2175,925 2175,1328.58 cw(c2275,1328.58) 2204.29,1399.29 2300.71,1495.71 cw(c2371.42,1425) 2371.42,1525 2695,1525 2695,2099.64 ccw(c2609.64,2099.64) 2670,2160 2621.21,2208.79 cw(c2672.43,2260) 2600,2260 2600,2390.86 ccw(c2565.86,2390.86) 2590,2415 2514.29,2490.71 cw(c2585,2561.42) 2485,2561.42 2485,2565 1586.42,2565 ccw(c1586.42,2465) 1515.71,2535.71 1455,2475
no net on Bottom Layer "NONET_L04_P003" (solid, pour order 3): 1585,2510 1084.29,2009.29 cw(c1013.58,2080) 1013.58,1980 930,1980 930,1415 1095,1415 1095,1126.42 ccw(c1195,1126.42) 1124.29,1055.71 1125.71,1054.29 ccw(c1196.42,1125) 1196.42,1025 1385,1025 cw(c1385,976.72) 1419.14,1010.86 1445,985 ccw(c1493.28,936.72) 1425,936.72 1425,930 2210,930 ccw(c2173.79,966.21) 2225,966.21 2225,1040 2473.58,1040 ccw(c2473.58,1140) 2544.29,1069.29 2590.71,1115.71 ccw(c2520,1186.42) 2620,1186.42 2620,1533.58 cw(c2720,1533.58) 2649.29,1604.29 2705,1660 ccw(c2692.93,1672.07) 2710,1672.07 2710,2160 2701.42,2160 cw(c2701.42,2260) 2630.71,2189.29 2565,2255 2580.71,2270.71 ccw(c2510,2341.42) 2610,2341.42 2610,2495 cw(c2610,2507.07) 2601.46,2498.54 2500,2600 ccw(c2463.79,2563.79) 2463.79,2615 2210,2615 2210,2631.72 ccw(c2141.72,2631.72) 2190,2680 2049.29,2539.29 cw(c1978.58,2610) 1978.58,2510

## Silkscreen, mask and mechanical layers (free items; w line width, h text height)
Bottom Overlay:
  drawing of 85 lines, arcs and shapes, not listed
Mechanical 1:
  lines w5: 1000,1195 1000,1415 910,1415 910,2215 1000,2215 1000,2420 ; 1195,1000 1405,1000 1405,910 ; 1195,2620 1400,2620 1400,2710 2210,2710 2210,2620 2420,2620 ; 1812.5,910 1405,910 ; 1812.5,1810 1812.5,2710 ; 2420,1000 2235,1000 2220,1000 2220,910 1405,910 ; 2615,2215 2630,2215 2720,2215 ; 2620,1200 2620,1415 2710,1415 2720,1415 2720,2215 ; 2620,2395 2620,2215 2622.5,2215 ; 2710,2215 2720,2215
  lines w10: 1000,1195 ccw(c1195,1195) 1195,1000 ; 1000,2420 cw(c1197.5,2422.5) 1195,2620 ; 2420,1000 ccw(c2420,1200) 2620,1200 ; 2420,2620 cw(c2425,2425) 2620,2430 2620,2395